# EAGLE board 536-counter-7seg-P (EAGLE 7.5.0)
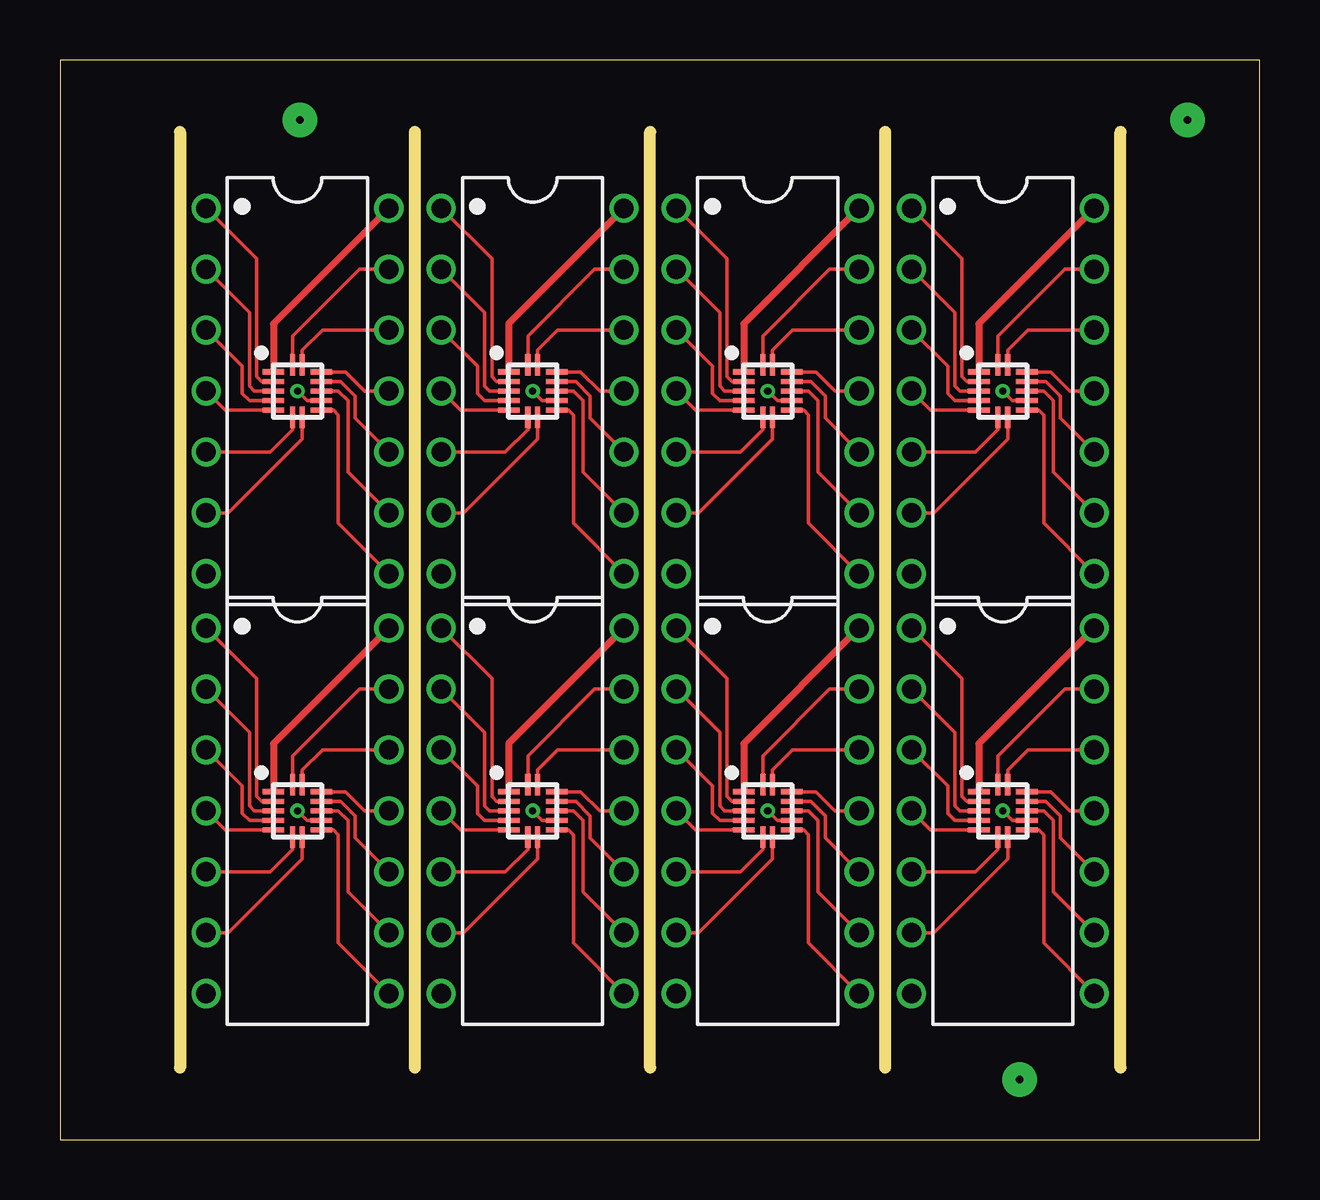
[diagram p0: board, top side]
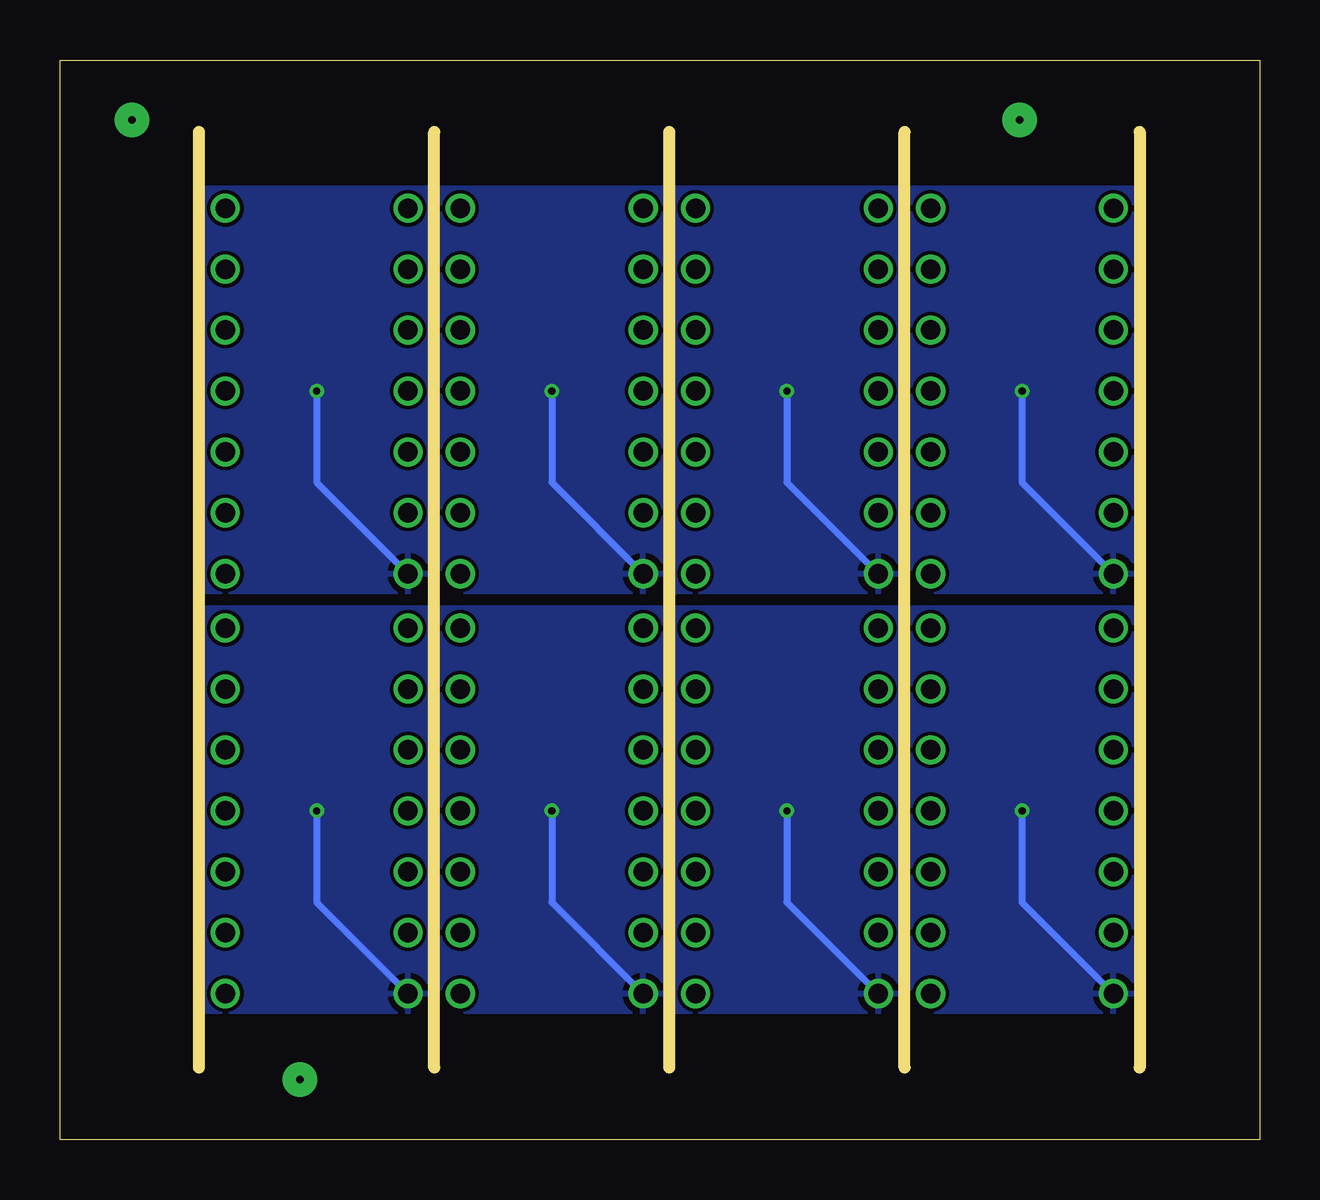
[diagram p1: board, bottom side, seen from below]

Size 50 x 45 mm. Coordinates in mm from the lower left corner, seen from the top.
Outline: 0,0 50,0 50,45 0,45 0,0
Copper layers (1*16): Top 0.035mm / dielectric 1.5mm / Bottom 0.035mm
Design rules "default *": minimum track width 0.15mm, minimum drill 0.3mm, track to track 0.15mm, track to pad 0.15mm, pad to pad 0.15mm, via to via 0.15mm, smd to smd 0.15mm, copper to edge 0.15mm, drill to drill 0.15mm, minimum pad ring 0.15mm, minimum via ring 0.15mm, stop-mask expansion 4mil, vias tented up to drill 0mil, thermal gap 10mil
Milling: 5 lines

## Footprints (pad centres in the part's own frame; a part is rotated, then mirrored left to right if it is on the bottom)
STQFN14-0.4P2.0X2.2 = smd 0.9 x 0.21: 1 -1,0.8; 2 -1,0.4; 3 -1,0; 4 -1,-0.4; 5 -1,-0.8; 8 1,-0.8; 9 1,-0.4; 10 1,0; 11 1,0.4; 12 1,0.8 | smd 0.21 x 0.9: 6 -0.2,-1.1; 7 0.2,-1.1; 13 0.2,1.1; 14 -0.2,1.1
IC-SOCKET-DIL-14 = drill 0.813: 1 -7.62,-3.81; 2 -5.08,-3.81; 3 -2.54,-3.81; 4 0,-3.81; 5 2.54,-3.81; 6 5.08,-3.81; 7 7.62,-3.81; 8 7.62,3.81; 9 5.08,3.81; 10 2.54,3.81; 11 0,3.81; 12 -2.54,3.81; 13 -5.08,3.81; 14 -7.62,3.81

## Placement (x,y rotation side)
IC1  [STQFN14-0.4P2.0X2.2]  9.9,13.7 0 top
IC2  IC-TTL-74-04,14-DIP  [IC-SOCKET-DIL-14]  9.9,13.7 270 top
IC3  [STQFN14-0.4P2.0X2.2]  9.9,31.2 0 top
IC4  IC-TTL-74-04,14-DIP  [IC-SOCKET-DIL-14]  9.9,31.2 270 top
IC5  [STQFN14-0.4P2.0X2.2]  19.7,31.2 0 top
IC6  IC-TTL-74-04,14-DIP  [IC-SOCKET-DIL-14]  19.7,31.2 270 top
IC7  [STQFN14-0.4P2.0X2.2]  19.7,13.7 0 top
IC8  IC-TTL-74-04,14-DIP  [IC-SOCKET-DIL-14]  19.7,13.7 270 top
IC9  [STQFN14-0.4P2.0X2.2]  29.5,13.7 0 top
IC10  IC-TTL-74-04,14-DIP  [IC-SOCKET-DIL-14]  29.5,13.7 270 top
IC11  [STQFN14-0.4P2.0X2.2]  29.5,31.2 0 top
IC12  IC-TTL-74-04,14-DIP  [IC-SOCKET-DIL-14]  29.5,31.2 270 top
IC13  [STQFN14-0.4P2.0X2.2]  39.3,31.2 0 top
IC14  IC-TTL-74-04,14-DIP  [IC-SOCKET-DIL-14]  39.3,31.2 270 top
IC15  [STQFN14-0.4P2.0X2.2]  39.3,13.7 0 top
IC16  IC-TTL-74-04,14-DIP  [IC-SOCKET-DIL-14]  39.3,13.7 270 top

## Library data of the parts
IC1-IC16 = mylib

## Nets
GND: IC1.9 IC2.7
GND1: IC3.9 IC4.7
GND2: IC5.9 IC6.7
GND3: IC7.9 IC8.7
GND4: IC9.9 IC10.7
GND5: IC11.9 IC12.7
GND6: IC13.9 IC14.7
GND7: IC15.9 IC16.7
N$1: IC1.1 IC2.14
N$3: IC1.2 IC2.1
N$4: IC1.3 IC2.2
N$5: IC1.4 IC2.3
N$6: IC1.5 IC2.4
N$7: IC1.6 IC2.5
N$8: IC1.7 IC2.6
N$9: IC1.8 IC2.8
N$10: IC1.10 IC2.9
N$11: IC1.11 IC2.10
N$12: IC1.12 IC2.11
N$13: IC1.13 IC2.12
N$14: IC1.14 IC2.13
N$17: IC3.1 IC4.14
N$18: IC3.2 IC4.1
N$19: IC3.3 IC4.2
N$20: IC3.4 IC4.3
N$21: IC3.5 IC4.4
N$22: IC3.6 IC4.5
N$23: IC3.7 IC4.6
N$24: IC3.8 IC4.8
N$25: IC3.10 IC4.9
N$26: IC3.11 IC4.10
N$27: IC3.12 IC4.11
N$28: IC3.13 IC4.12
N$29: IC3.14 IC4.13
N$30: IC5.1 IC6.14
N$31: IC5.2 IC6.1
N$32: IC5.3 IC6.2
N$33: IC5.4 IC6.3
N$34: IC5.5 IC6.4
N$35: IC5.6 IC6.5
N$36: IC5.7 IC6.6
N$37: IC5.8 IC6.8
N$38: IC5.10 IC6.9
N$39: IC5.11 IC6.10
N$40: IC5.12 IC6.11
N$41: IC5.13 IC6.12
N$42: IC5.14 IC6.13
N$43: IC7.1 IC8.14
N$44: IC7.2 IC8.1
N$45: IC7.3 IC8.2
N$46: IC7.4 IC8.3
N$47: IC7.5 IC8.4
N$48: IC7.6 IC8.5
N$49: IC7.7 IC8.6
N$50: IC7.8 IC8.8
N$51: IC7.10 IC8.9
N$52: IC7.11 IC8.10
N$53: IC7.12 IC8.11
N$54: IC7.13 IC8.12
N$55: IC7.14 IC8.13
N$56: IC9.1 IC10.14
N$57: IC9.2 IC10.1
N$58: IC9.3 IC10.2
N$59: IC9.4 IC10.3
N$60: IC9.5 IC10.4
N$61: IC9.6 IC10.5
N$62: IC9.7 IC10.6
N$63: IC9.8 IC10.8
N$64: IC9.10 IC10.9
N$65: IC9.11 IC10.10
N$66: IC9.12 IC10.11
N$67: IC9.13 IC10.12
N$68: IC9.14 IC10.13
N$69: IC11.1 IC12.14
N$70: IC11.2 IC12.1
N$71: IC11.3 IC12.2
N$72: IC11.4 IC12.3
N$73: IC11.5 IC12.4
N$74: IC11.6 IC12.5
N$75: IC11.7 IC12.6
N$76: IC11.8 IC12.8
N$77: IC11.10 IC12.9
N$78: IC11.11 IC12.10
N$79: IC11.12 IC12.11
N$80: IC11.13 IC12.12
N$81: IC11.14 IC12.13
N$82: IC13.1 IC14.14
N$83: IC13.2 IC14.1
N$84: IC13.3 IC14.2
N$85: IC13.4 IC14.3
N$86: IC13.5 IC14.4
N$87: IC13.6 IC14.5
N$88: IC13.7 IC14.6
N$89: IC13.8 IC14.8
N$90: IC13.10 IC14.9
N$91: IC13.11 IC14.10
N$92: IC13.12 IC14.11
N$93: IC13.13 IC14.12
N$94: IC13.14 IC14.13
N$95: IC15.1 IC16.14
N$96: IC15.2 IC16.1
N$97: IC15.3 IC16.2
N$98: IC15.4 IC16.3
N$99: IC15.5 IC16.4
N$100: IC15.6 IC16.5
N$101: IC15.7 IC16.6
N$102: IC15.8 IC16.8
N$103: IC15.10 IC16.9
N$104: IC15.11 IC16.10
N$105: IC15.12 IC16.11
N$106: IC15.13 IC16.12
N$107: IC15.14 IC16.13

## Tracks (layer width: path | path; a pad name or v marks a point on that pad's centre or on a via)
GND  (via drill 0.3)
  Top 0.15: IC1.9 10.3,13.3 v9.9,13.7
  Bottom 0.3: v9.9,13.7 9.9,9.89 IC2.7
  pour Bottom: 5.3,22.2 14.5,22.2 14.5,5.3 5.3,5.3
GND1  (via drill 0.3)
  Top 0.15: IC3.9 10.3,30.8 v9.9,31.2
  Bottom 0.3: v9.9,31.2 9.9,27.39 IC4.7
  pour Bottom: 5.3,39.7 14.5,39.7 14.5,22.8 5.3,22.8
GND2  (via drill 0.3)
  Top 0.15: IC5.9 20.1,30.8 v19.7,31.2
  Bottom 0.3: v19.7,31.2 19.7,27.39 IC6.7
  pour Bottom: 15.1,39.7 24.3,39.7 24.3,22.8 15.1,22.8
GND3  (via drill 0.3)
  Top 0.15: IC7.9 20.1,13.3 v19.7,13.7
  Bottom 0.3: v19.7,13.7 19.7,9.89 IC8.7
  pour Bottom: 15.1,22.2 24.3,22.2 24.3,5.3 15.1,5.3
GND4  (via drill 0.3)
  Top 0.15: IC9.9 29.9,13.3 v29.5,13.7
  Bottom 0.3: v29.5,13.7 29.5,9.89 IC10.7
  pour Bottom: 24.9,22.2 34.1,22.2 34.1,5.3 24.9,5.3
GND5  (via drill 0.3)
  Top 0.15: IC11.9 29.9,30.8 v29.5,31.2
  Bottom 0.3: v29.5,31.2 29.5,27.39 IC12.7
  pour Bottom: 24.9,39.7 34.1,39.7 34.1,22.8 24.9,22.8
GND6  (via drill 0.3)
  Top 0.15: IC13.9 39.7,30.8 v39.3,31.2
  Bottom 0.3: v39.3,31.2 39.3,27.39 IC14.7
  pour Bottom: 34.7,39.7 43.9,39.7 43.9,22.8 34.7,22.8
GND7  (via drill 0.3)
  Top 0.15: IC15.9 39.7,13.3 v39.3,13.7
  Bottom 0.3: v39.3,13.7 39.3,9.89 IC16.7
  pour Bottom: 34.7,22.2 43.9,22.2 43.9,5.3 34.7,5.3
N$1
  Top 0.15: 8.9,14.6 IC1.1
  Top 0.3: 8.9,14.6 8.9,16.51 IC2.14
N$2  (via drill 0.3 pad 1.42)
  other vias: 10,42.5
N$3
  Top 0.15: IC2.1 8.2,19.21 8.2,14.3 8.4,14.1 IC1.2
N$4
  Top 0.15: IC2.2 7.9,16.97 7.9,13.9 8.1,13.7 IC1.3
N$5
  Top 0.15: IC2.3 7.6,14.73 7.6,13.6 7.9,13.3 IC1.4
N$6
  Top 0.15: IC2.4 6.89,12.9 IC1.5
N$7
  Top 0.15: IC1.6 9.7,12.1 8.76,11.16 IC2.5
N$8
  Top 0.15: IC1.7 10.1,11.7 7.02,8.62 IC2.6
N$9
  Top 0.15: IC1.8 11.4,12.9 11.6,12.7 11.6,8.19 IC2.8
N$10
  Top 0.15: IC1.10 11.6,13.7 12,13.3 12,10.33 IC2.9
N$11
  Top 0.15: IC1.11 11.7,14.1 12.3,13.5 12.3,12.57 IC2.10
N$12
  Top 0.15: IC1.12 11.9,14.5 12.7,13.7 IC2.11
N$13
  Top 0.15: IC1.13 10.1,15.4 10.94,16.24 IC2.12
N$14
  Top 0.15: IC2.13 12.48,18.78 9.7,16 IC1.14
N$15  (via drill 0.3 pad 1.42)
  other vias: 47,42.5
N$16  (via drill 0.3 pad 1.42)
  other vias: 40,2.5
N$17
  Top 0.15: 8.9,32.1 IC3.1
  Top 0.3: 8.9,32.1 8.9,34.01 IC4.14
N$18
  Top 0.15: IC4.1 8.2,36.71 8.2,31.8 8.4,31.6 IC3.2
N$19
  Top 0.15: IC4.2 7.9,34.47 7.9,31.4 8.1,31.2 IC3.3
N$20
  Top 0.15: IC4.3 7.6,32.23 7.6,31.1 7.9,30.8 IC3.4
N$21
  Top 0.15: IC4.4 6.89,30.4 IC3.5
N$22
  Top 0.15: IC3.6 9.7,29.6 8.76,28.66 IC4.5
N$23
  Top 0.15: IC3.7 10.1,29.2 7.02,26.12 IC4.6
N$24
  Top 0.15: IC3.8 11.4,30.4 11.6,30.2 11.6,25.69 IC4.8
N$25
  Top 0.15: IC3.10 11.6,31.2 12,30.8 12,27.83 IC4.9
N$26
  Top 0.15: IC3.11 11.7,31.6 12.3,31 12.3,30.07 IC4.10
N$27
  Top 0.15: IC3.12 11.9,32 12.7,31.2 IC4.11
N$28
  Top 0.15: IC3.13 10.1,32.9 10.94,33.74 IC4.12
N$29
  Top 0.15: IC4.13 12.48,36.28 9.7,33.5 IC3.14
N$30
  Top 0.15: 18.7,32.1 IC5.1
  Top 0.3: 18.7,32.1 18.7,34.01 IC6.14
N$31
  Top 0.15: IC6.1 18,36.71 18,31.8 18.2,31.6 IC5.2
N$32
  Top 0.15: IC6.2 17.7,34.47 17.7,31.4 17.9,31.2 IC5.3
N$33
  Top 0.15: IC6.3 17.4,32.23 17.4,31.1 17.7,30.8 IC5.4
N$34
  Top 0.15: IC6.4 16.69,30.4 IC5.5
N$35
  Top 0.15: IC5.6 19.5,29.6 18.56,28.66 IC6.5
N$36
  Top 0.15: IC5.7 19.9,29.2 16.82,26.12 IC6.6
N$37
  Top 0.15: IC5.8 21.2,30.4 21.4,30.2 21.4,25.69 IC6.8
N$38
  Top 0.15: IC5.10 21.4,31.2 21.8,30.8 21.8,27.83 IC6.9
N$39
  Top 0.15: IC5.11 21.5,31.6 22.1,31 22.1,30.07 IC6.10
N$40
  Top 0.15: IC5.12 21.7,32 22.5,31.2 IC6.11
N$41
  Top 0.15: IC5.13 19.9,32.9 20.74,33.74 IC6.12
N$42
  Top 0.15: IC6.13 22.28,36.28 19.5,33.5 IC5.14
N$43
  Top 0.15: 18.7,14.6 IC7.1
  Top 0.3: 18.7,14.6 18.7,16.51 IC8.14
N$44
  Top 0.15: IC8.1 18,19.21 18,14.3 18.2,14.1 IC7.2
N$45
  Top 0.15: IC8.2 17.7,16.97 17.7,13.9 17.9,13.7 IC7.3
N$46
  Top 0.15: IC8.3 17.4,14.73 17.4,13.6 17.7,13.3 IC7.4
N$47
  Top 0.15: IC8.4 16.69,12.9 IC7.5
N$48
  Top 0.15: IC7.6 19.5,12.1 18.56,11.16 IC8.5
N$49
  Top 0.15: IC7.7 19.9,11.7 16.82,8.62 IC8.6
N$50
  Top 0.15: IC7.8 21.2,12.9 21.4,12.7 21.4,8.19 IC8.8
N$51
  Top 0.15: IC7.10 21.4,13.7 21.8,13.3 21.8,10.33 IC8.9
N$52
  Top 0.15: IC7.11 21.5,14.1 22.1,13.5 22.1,12.57 IC8.10
N$53
  Top 0.15: IC7.12 21.7,14.5 22.5,13.7 IC8.11
N$54
  Top 0.15: IC7.13 19.9,15.4 20.74,16.24 IC8.12
N$55
  Top 0.15: IC8.13 22.28,18.78 19.5,16 IC7.14
N$56
  Top 0.15: 28.5,14.6 IC9.1
  Top 0.3: 28.5,14.6 28.5,16.51 IC10.14
N$57
  Top 0.15: IC10.1 27.8,19.21 27.8,14.3 28,14.1 IC9.2
N$58
  Top 0.15: IC10.2 27.5,16.97 27.5,13.9 27.7,13.7 IC9.3
N$59
  Top 0.15: IC10.3 27.2,14.73 27.2,13.6 27.5,13.3 IC9.4
N$60
  Top 0.15: IC10.4 26.49,12.9 IC9.5
N$61
  Top 0.15: IC9.6 29.3,12.1 28.36,11.16 IC10.5
N$62
  Top 0.15: IC9.7 29.7,11.7 26.62,8.62 IC10.6
N$63
  Top 0.15: IC9.8 31,12.9 31.2,12.7 31.2,8.19 IC10.8
N$64
  Top 0.15: IC9.10 31.2,13.7 31.6,13.3 31.6,10.33 IC10.9
N$65
  Top 0.15: IC9.11 31.3,14.1 31.9,13.5 31.9,12.57 IC10.10
N$66
  Top 0.15: IC9.12 31.5,14.5 32.3,13.7 IC10.11
N$67
  Top 0.15: IC9.13 29.7,15.4 30.54,16.24 IC10.12
N$68
  Top 0.15: IC10.13 32.08,18.78 29.3,16 IC9.14
N$69
  Top 0.15: 28.5,32.1 IC11.1
  Top 0.3: 28.5,32.1 28.5,34.01 IC12.14
N$70
  Top 0.15: IC12.1 27.8,36.71 27.8,31.8 28,31.6 IC11.2
N$71
  Top 0.15: IC12.2 27.5,34.47 27.5,31.4 27.7,31.2 IC11.3
N$72
  Top 0.15: IC12.3 27.2,32.23 27.2,31.1 27.5,30.8 IC11.4
N$73
  Top 0.15: IC12.4 26.49,30.4 IC11.5
N$74
  Top 0.15: IC11.6 29.3,29.6 28.36,28.66 IC12.5
N$75
  Top 0.15: IC11.7 29.7,29.2 26.62,26.12 IC12.6
N$76
  Top 0.15: IC11.8 31,30.4 31.2,30.2 31.2,25.69 IC12.8
N$77
  Top 0.15: IC11.10 31.2,31.2 31.6,30.8 31.6,27.83 IC12.9
N$78
  Top 0.15: IC11.11 31.3,31.6 31.9,31 31.9,30.07 IC12.10
N$79
  Top 0.15: IC11.12 31.5,32 32.3,31.2 IC12.11
N$80
  Top 0.15: IC11.13 29.7,32.9 30.54,33.74 IC12.12
N$81
  Top 0.15: IC12.13 32.08,36.28 29.3,33.5 IC11.14
N$82
  Top 0.15: 38.3,32.1 IC13.1
  Top 0.3: 38.3,32.1 38.3,34.01 IC14.14
N$83
  Top 0.15: IC14.1 37.6,36.71 37.6,31.8 37.8,31.6 IC13.2
N$84
  Top 0.15: IC14.2 37.3,34.47 37.3,31.4 37.5,31.2 IC13.3
N$85
  Top 0.15: IC14.3 37,32.23 37,31.1 37.3,30.8 IC13.4
N$86
  Top 0.15: IC14.4 36.29,30.4 IC13.5
N$87
  Top 0.15: IC13.6 39.1,29.6 38.16,28.66 IC14.5
N$88
  Top 0.15: IC13.7 39.5,29.2 36.42,26.12 IC14.6
N$89
  Top 0.15: IC13.8 40.8,30.4 41,30.2 41,25.69 IC14.8
N$90
  Top 0.15: IC13.10 41,31.2 41.4,30.8 41.4,27.83 IC14.9
N$91
  Top 0.15: IC13.11 41.1,31.6 41.7,31 41.7,30.07 IC14.10
N$92
  Top 0.15: IC13.12 41.3,32 42.1,31.2 IC14.11
N$93
  Top 0.15: IC13.13 39.5,32.9 40.34,33.74 IC14.12
N$94
  Top 0.15: IC14.13 41.88,36.28 39.1,33.5 IC13.14
N$95
  Top 0.15: 38.3,14.6 IC15.1
  Top 0.3: 38.3,14.6 38.3,16.51 IC16.14
N$96
  Top 0.15: IC16.1 37.6,19.21 37.6,14.3 37.8,14.1 IC15.2
N$97
  Top 0.15: IC16.2 37.3,16.97 37.3,13.9 37.5,13.7 IC15.3
N$98
  Top 0.15: IC16.3 37,14.73 37,13.6 37.3,13.3 IC15.4
N$99
  Top 0.15: IC16.4 36.29,12.9 IC15.5
N$100
  Top 0.15: IC15.6 39.1,12.1 38.16,11.16 IC16.5
N$101
  Top 0.15: IC15.7 39.5,11.7 36.42,8.62 IC16.6
N$102
  Top 0.15: IC15.8 40.8,12.9 41,12.7 41,8.19 IC16.8
N$103
  Top 0.15: IC15.10 41,13.7 41.4,13.3 41.4,10.33 IC16.9
N$104
  Top 0.15: IC15.11 41.1,14.1 41.7,13.5 41.7,12.57 IC16.10
N$105
  Top 0.15: IC15.12 41.3,14.5 42.1,13.7 IC16.11
N$106
  Top 0.15: IC15.13 39.5,15.4 40.34,16.24 IC16.12
N$107
  Top 0.15: IC16.13 41.88,18.78 39.1,16 IC15.14

## Text on the board
Vscore: v-cut -> | v-cut -> | v-cut ->